# EAGLE board whisker_module (EAGLE 6.3), part 1 of 2
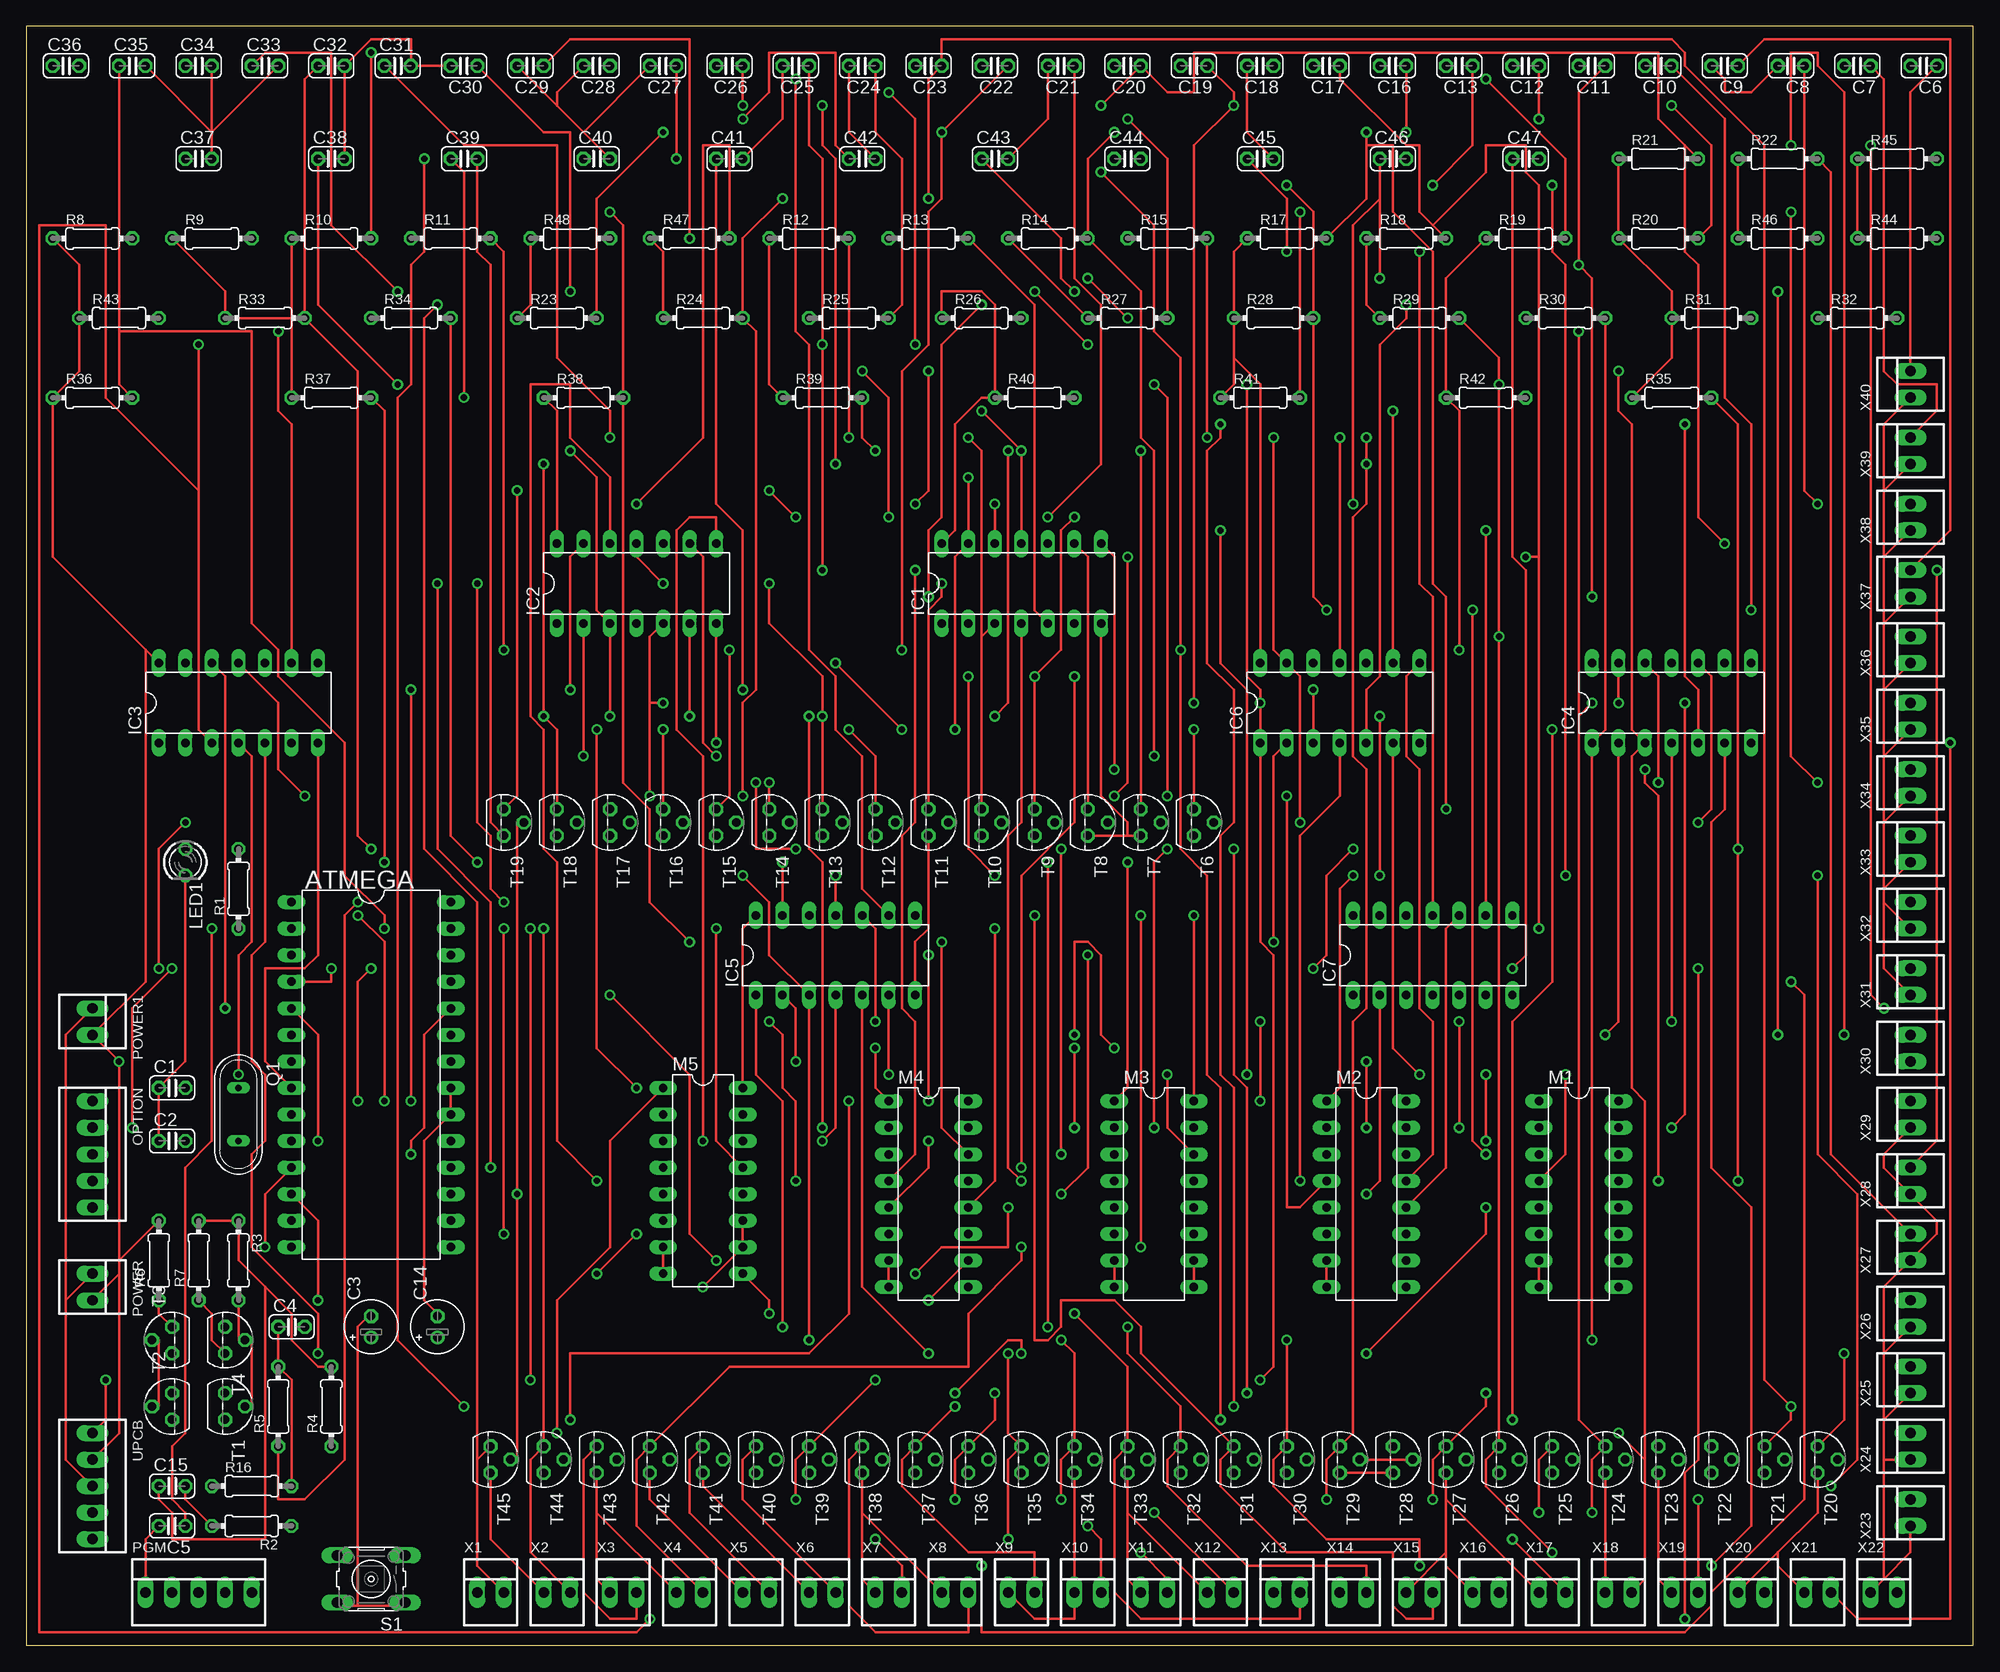
[diagram p0: board, top side]
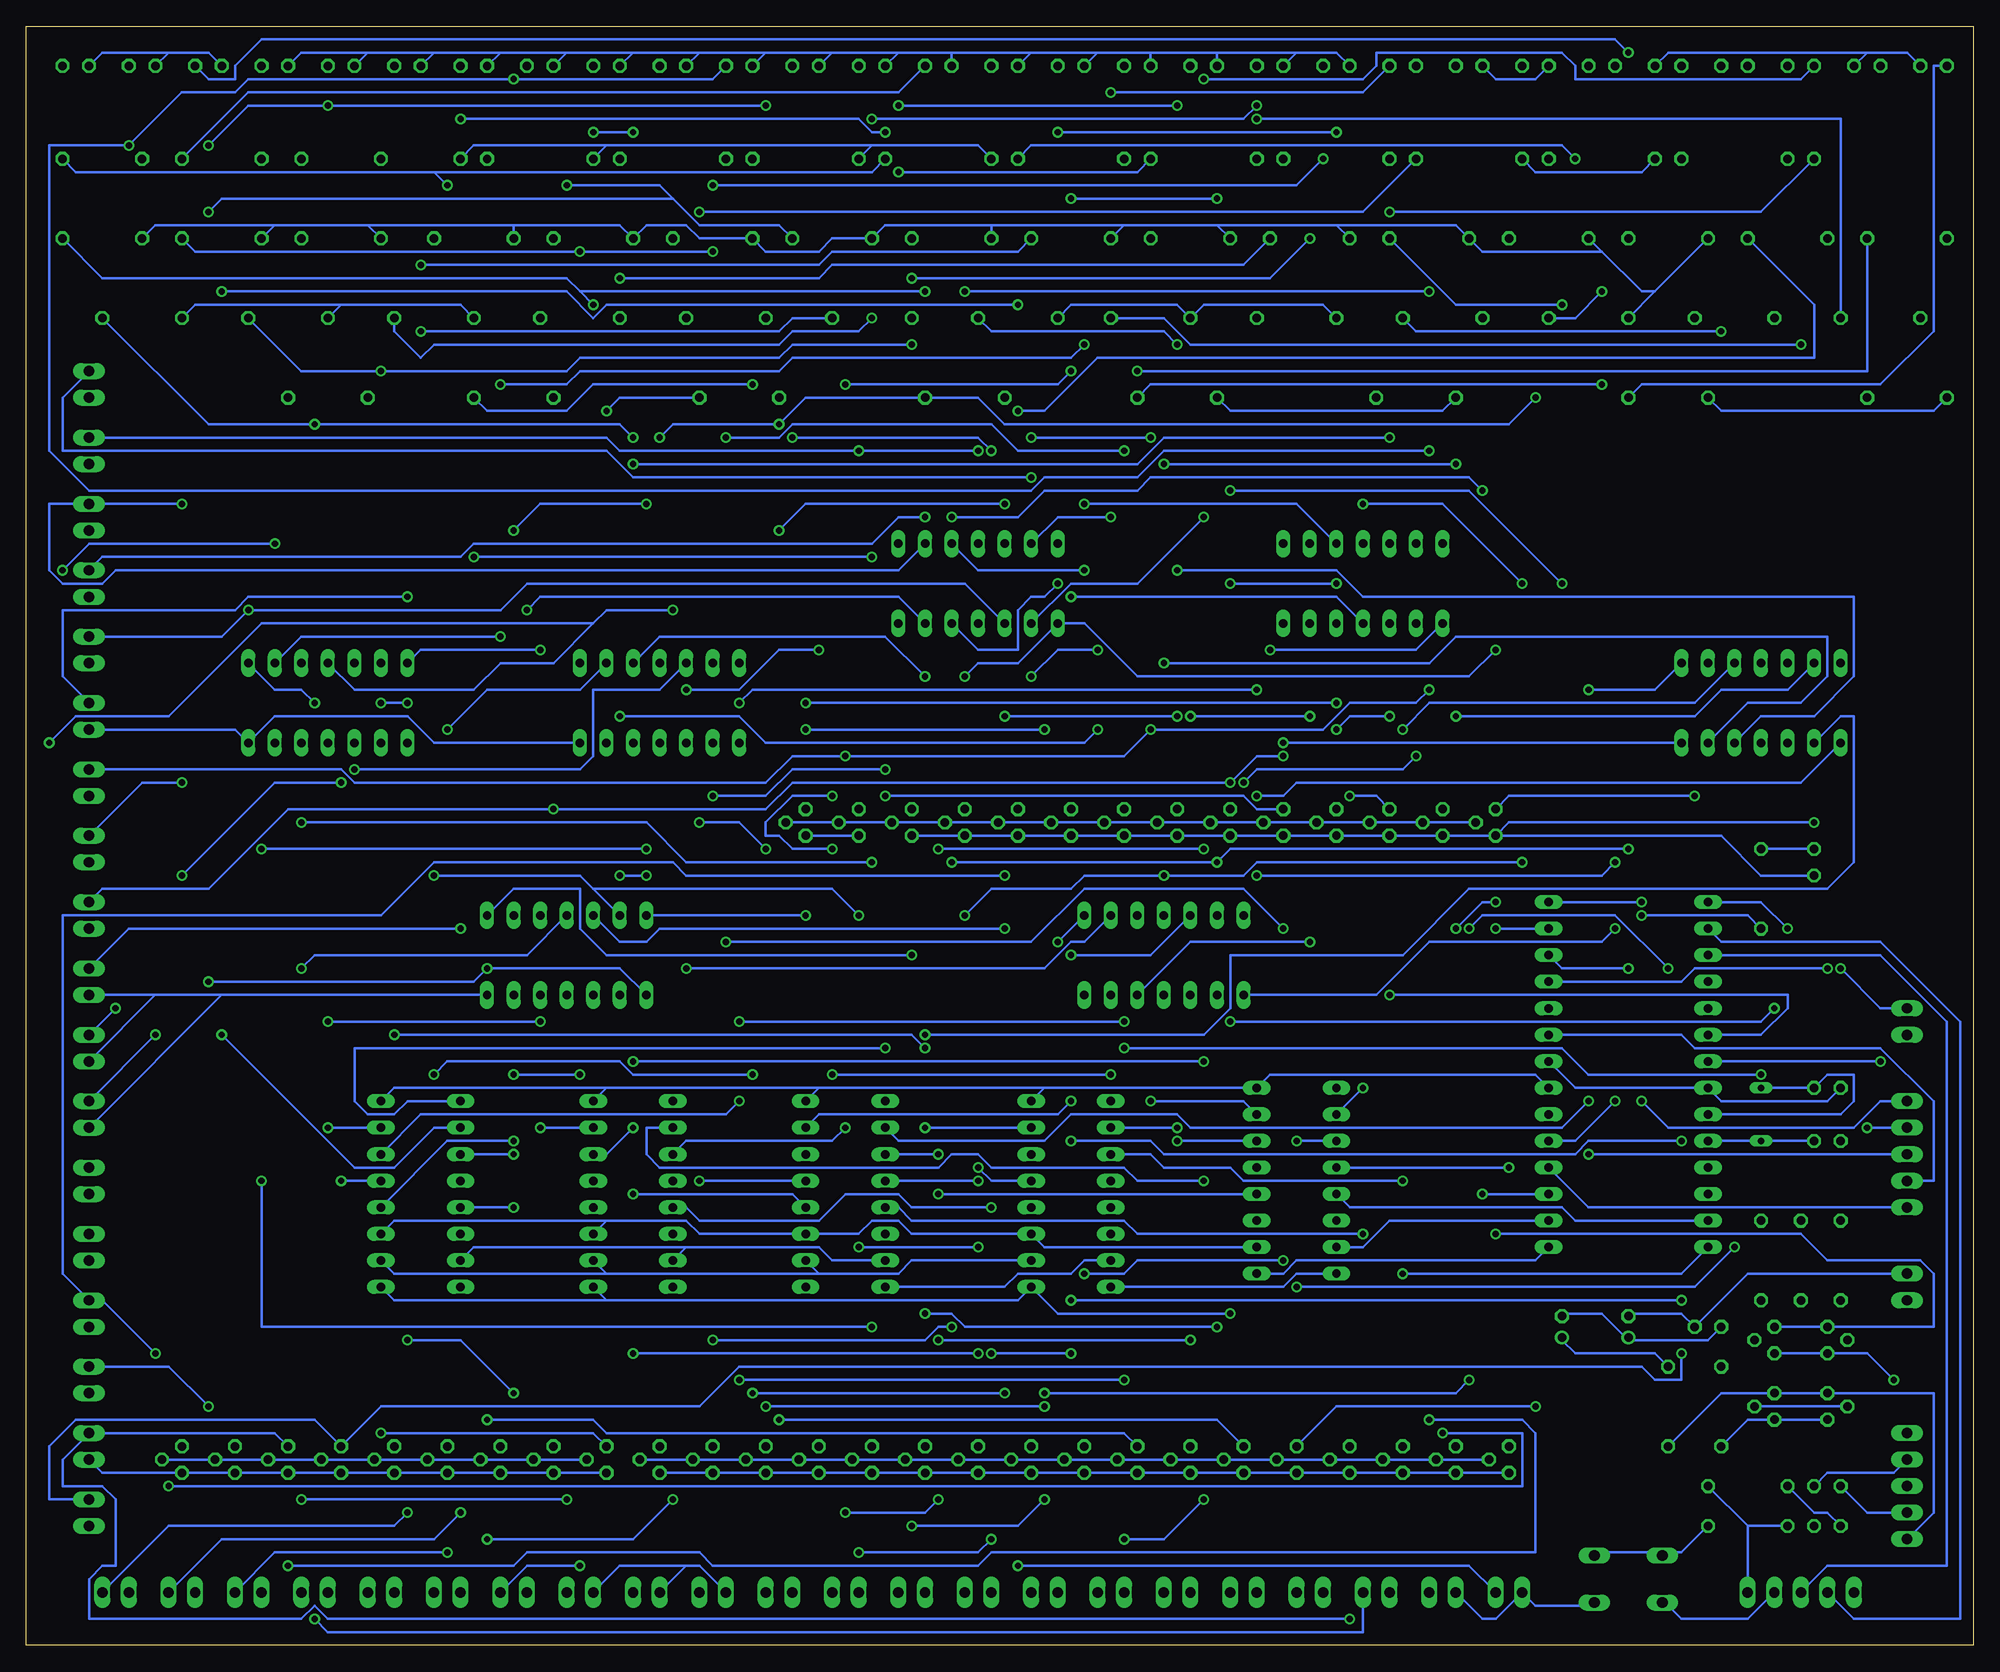
[diagram p1: board, bottom side, seen from below]

Size 186.36 x 154.93 mm. Coordinates in mm from the lower left corner, seen from the top.
Outline: 0,0 186.36,0 186.36,154.93 0,154.93 0,0
Copper layers (1*16): Top 0.035mm / dielectric 1.5mm / Bottom 0.035mm
Design rules "default": minimum track width 10mil, minimum drill 24mil, track to track 8mil, track to pad 8mil, pad to pad 8mil, via to via 8mil, smd to smd 8mil, copper to edge 40mil, drill to drill 8mil, minimum pad ring 10mil, minimum via ring 8mil, stop-mask expansion 4mil, vias tented up to drill 0mil, thermal gap 10mil

## Footprints (pad centres in the part's own frame; a part is rotated, then mirrored left to right if it is on the bottom)
DIL28-6 = drill 0.813 long: 1 -16.51,-7.62; 2 -13.97,-7.62; 3 -11.43,-7.62; 4 -8.89,-7.62; 5 -6.35,-7.62; 6 -3.81,-7.62; 7 -1.27,-7.62; 8 1.27,-7.62; 9 3.81,-7.62; 10 6.35,-7.62; 11 8.89,-7.62; 12 11.43,-7.62; 13 13.97,-7.62; 14 16.51,-7.62; 15 16.51,7.62; 16 13.97,7.62; 17 11.43,7.62; 18 8.89,7.62; 19 6.35,7.62; 20 3.81,7.62; 21 1.27,7.62; 22 -1.27,7.62; 23 -3.81,7.62; 24 -6.35,7.62; 25 -8.89,7.62; 26 -11.43,7.62; 27 -13.97,7.62; 28 -16.51,7.62
C025-024X044 = drill 0.813 octagon: 1 -1.27,0; 2 1.27,0
E2-5 = drill 0.813 pad 1.27: + -1.016,0 | drill 0.813 pad 1.27 octagon: - 1.016,0
DIL14 = drill 0.813 long: 1 -7.62,-3.81; 2 -5.08,-3.81; 3 -2.54,-3.81; 4 0,-3.81; 5 2.54,-3.81; 6 5.08,-3.81; 7 7.62,-3.81; 8 7.62,3.81; 9 5.08,3.81; 10 2.54,3.81; 11 0,3.81; 12 -2.54,3.81; 13 -5.08,3.81; 14 -7.62,3.81
LED3MM = drill 0.813 octagon: A -1.27,0; K 1.27,0
CD74HCT151E = drill 0.813 long: 1 -7.62,-3.81; 2 -5.08,-3.81; 3 -2.54,-3.81; 4 0,-3.81; 5 2.54,-3.81; 6 5.08,-3.81; 7 7.62,-3.81; 8 10.16,-3.81; 9 10.16,3.81; 10 7.62,3.81; 11 5.08,3.81; 12 2.54,3.81; 13 0,3.81; 14 -2.54,3.81; 15 -5.08,3.81; 16 -7.62,3.81
22-23-2051 = drill 1 long: 1 -5.08,0; 2 -2.54,0; 3 0,0; 4 2.54,0; 5 5.08,0
22-23-2021 = drill 1 long: 1 -1.27,0; 2 1.27,0
QS = drill 0.61 long: 1 -2.54,0; 2 2.54,0
0204/7 = drill 0.813 octagon: 1 -3.81,0; 2 3.81,0
B3F-10XX = drill 1.016 long: 1 -3.251,2.261; 2 3.251,2.261; 3 -3.251,-2.261; 4 3.251,-2.261
TO92-E1 = drill 0.813 octagon: 1 -1.27,0; 2 0,1.905; 3 1.27,0
TO92 = drill 0.813 octagon: 1 1.27,0; 2 0,1.905; 3 -1.27,0

## Placement (x,y rotation side)
ATMEGA  328  [DIL28-6]  33.02,54.61 270 top
C1  22PF  [C025-024X044]  13.97,53.34 0 top
C2  22PF  [C025-024X044]  13.97,48.26 0 top
C3  100uF  [E2-5]  33.02,30.48 90 top
C4  0.1uF  [C025-024X044]  25.4,30.48 0 top
C5  0.1uF  [C025-024X044]  13.97,11.43 180 top
C6  0.1uF  [C025-024X044]  181.61,151.13 180 top
C7  0.1uF  [C025-024X044]  175.26,151.13 180 top
C8  0.1uF  [C025-024X044]  168.91,151.13 180 top
C9  0.1uF  [C025-024X044]  162.56,151.13 180 top
C10  0.1uF  [C025-024X044]  156.21,151.13 180 top
C11  0.1uF  [C025-024X044]  149.86,151.13 180 top
C12  0.1uF  [C025-024X044]  143.51,151.13 180 top
C13  0.1uF  [C025-024X044]  137.16,151.13 180 top
C14  100uF  [E2-5]  39.37,30.48 90 top
C15  0.1uF  [C025-024X044]  13.97,15.24 0 top
C16  0.1uF  [C025-024X044]  130.81,151.13 180 top
C17  0.1uF  [C025-024X044]  124.46,151.13 180 top
C18  0.1uF  [C025-024X044]  118.11,151.13 180 top
C19  0.1uF  [C025-024X044]  111.76,151.13 180 top
C20  0.1uF  [C025-024X044]  105.41,151.13 180 top
C21  0.1uF  [C025-024X044]  99.06,151.13 180 top
C22  0.1uF  [C025-024X044]  92.71,151.13 180 top
C23  0.1uF  [C025-024X044]  86.36,151.13 180 top
C24  0.1uF  [C025-024X044]  80.01,151.13 180 top
C25  0.1uF  [C025-024X044]  73.66,151.13 180 top
C26  0.1uF  [C025-024X044]  67.31,151.13 180 top
C27  0.1uF  [C025-024X044]  60.96,151.13 180 top
C28  0.1uF  [C025-024X044]  54.61,151.13 180 top
C29  0.1uF  [C025-024X044]  48.26,151.13 180 top
C30  0.1uF  [C025-024X044]  41.91,151.13 180 top
C31  0.1uF  [C025-024X044]  35.56,151.13 0 top
C32  0.1uF  [C025-024X044]  29.21,151.13 0 top
C33  0.1uF  [C025-024X044]  22.86,151.13 0 top
C34  0.1uF  [C025-024X044]  16.51,151.13 0 top
C35  0.1uF  [C025-024X044]  10.16,151.13 0 top
C36  0.1uF  [C025-024X044]  3.81,151.13 0 top
C37  0.1uF  [C025-024X044]  16.51,142.24 0 top
C38  0.1uF  [C025-024X044]  29.21,142.24 0 top
C39  0.1uF  [C025-024X044]  41.91,142.24 0 top
C40  0.1uF  [C025-024X044]  54.61,142.24 0 top
C41  0.1uF  [C025-024X044]  67.31,142.24 0 top
C42  0.1uF  [C025-024X044]  80.01,142.24 0 top
C43  0.1uF  [C025-024X044]  92.71,142.24 0 top
C44  0.1uF  [C025-024X044]  105.41,142.24 0 top
C45  0.1uF  [C025-024X044]  118.11,142.24 0 top
C46  0.1uF  [C025-024X044]  130.81,142.24 0 top
C47  0.1uF  [C025-024X044]  143.51,142.24 0 top
IC1  74LS14N  [DIL14]  95.25,101.6 0 top
IC2  74LS14N  [DIL14]  58.42,101.6 0 top
IC3  74LS14N  [DIL14]  20.32,90.17 0 top
IC4  74LS14N  [DIL14]  157.48,90.17 0 top
IC5  74LS14N  [DIL14]  77.47,66.04 0 top
IC6  74LS14N  [DIL14]  125.73,90.17 0 top
IC7  74LS14N  [DIL14]  134.62,66.04 0 top
LED1  [LED3MM]  15.24,74.93 270 top
M1  CD74HCT151E  [CD74HCT151E]  148.59,44.45 270 top
M2  CD74HCT151E  [CD74HCT151E]  128.27,44.45 270 top
M3  CD74HCT151E  [CD74HCT151E]  107.95,44.45 270 top
M4  CD74HCT151E  [CD74HCT151E]  86.36,44.45 270 top
M5  CD74HCT151E  [CD74HCT151E]  64.77,45.72 270 top
OPTION  22-23-2051  [22-23-2051]  6.35,46.99 270 top
PGM  22-23-2051  [22-23-2051]  16.51,5.08 0 top
POWER  22-23-2021  [22-23-2021]  6.35,34.29 270 top
POWER1  22-23-2021  [22-23-2021]  6.35,59.69 270 top
Q1  16MHZ  [QS]  20.32,50.8 270 top
R1  220OHM  [0204/7]  20.32,72.39 90 top
R2  10KOHM  [0204/7]  21.59,11.43 180 top
R3  10KOHM  [0204/7]  20.32,36.83 270 top
R4  10KOHM  [0204/7]  29.21,22.86 90 top
R5  10KOHM  [0204/7]  24.13,22.86 90 top
R6  10KOHM  [0204/7]  12.7,36.83 90 top
R7  10KOHM  [0204/7]  16.51,36.83 90 top
R8  10KOHM  [0204/7]  6.35,134.62 0 top
R9  10KOHM  [0204/7]  17.78,134.62 0 top
R10  10KOHM  [0204/7]  29.21,134.62 0 top
R11  10KOHM  [0204/7]  40.64,134.62 0 top
R12  10KOHM  [0204/7]  74.93,134.62 0 top
R13  10KOHM  [0204/7]  86.36,134.62 0 top
R14  10KOHM  [0204/7]  97.79,134.62 0 top
R15  10KOHM  [0204/7]  109.22,134.62 0 top
R16  10KOHM  [0204/7]  21.59,15.24 0 top
R17  10KOHM  [0204/7]  120.65,134.62 0 top
R18  10KOHM  [0204/7]  132.08,134.62 0 top
R19  10KOHM  [0204/7]  143.51,134.62 0 top
R20  10KOHM  [0204/7]  156.21,134.62 0 top
R21  10KOHM  [0204/7]  156.21,142.24 0 top
R22  10KOHM  [0204/7]  167.64,142.24 0 top
R23  10KOHM  [0204/7]  50.8,127 0 top
R24  10KOHM  [0204/7]  64.77,127 0 top
R25  10KOHM  [0204/7]  78.74,127 0 top
R26  10KOHM  [0204/7]  91.44,127 0 top
R27  10KOHM  [0204/7]  105.41,127 0 top
R28  10KOHM  [0204/7]  119.38,127 0 top
R29  10KOHM  [0204/7]  133.35,127 0 top
R30  10KOHM  [0204/7]  147.32,127 0 top
R31  10KOHM  [0204/7]  161.29,127 0 top
R32  10KOHM  [0204/7]  175.26,127 0 top
R33  10KOHM  [0204/7]  22.86,127 0 top
R34  10KOHM  [0204/7]  36.83,127 0 top
R35  10KOHM  [0204/7]  157.48,119.38 0 top
R36  10KOHM  [0204/7]  6.35,119.38 0 top
R37  10KOHM  [0204/7]  29.21,119.38 0 top
R38  10KOHM  [0204/7]  53.34,119.38 0 top
R39  10KOHM  [0204/7]  76.2,119.38 0 top
R40  10KOHM  [0204/7]  96.52,119.38 0 top
R41  10KOHM  [0204/7]  118.11,119.38 0 top
R42  10KOHM  [0204/7]  139.7,119.38 0 top
R43  10KOHM  [0204/7]  8.89,127 0 top
R44  10KOHM  [0204/7]  179.07,134.62 0 top
R45  10KOHM  [0204/7]  179.07,142.24 0 top
R46  10KOHM  [0204/7]  167.64,134.62 0 top
R47  10KOHM  [0204/7]  63.5,134.62 0 top
R48  10KOHM  [0204/7]  52.07,134.62 0 top
S1  [B3F-10XX]  33.02,6.35 180 top
T1  BJT  [TO92-E1]  19.05,22.86 270 top
T2  BJT  [TO92-E1]  13.97,22.86 90 top
T3  BJT  [TO92-E1]  13.97,29.21 90 top
T4  BJT  [TO92-E1]  19.05,29.21 270 top
T6  2N3565  [TO92]  111.76,78.74 270 top
T7  2N3565  [TO92]  106.68,78.74 270 top
T8  2N3565  [TO92]  101.6,78.74 270 top
T9  2N3565  [TO92]  96.52,78.74 270 top
T10  2N3565  [TO92]  91.44,78.74 270 top
T11  2N3565  [TO92]  86.36,78.74 270 top
T12  2N3565  [TO92]  81.28,78.74 270 top
T13  2N3565  [TO92]  76.2,78.74 270 top
T14  2N3565  [TO92]  71.12,78.74 270 top
T15  2N3565  [TO92]  66.04,78.74 270 top
T16  2N3565  [TO92]  60.96,78.74 270 top
T17  2N3565  [TO92]  55.88,78.74 270 top
T18  2N3565  [TO92]  50.8,78.74 270 top
T19  2N3565  [TO92]  45.72,78.74 270 top
T20  2N3565  [TO92]  171.45,17.78 270 top
T21  2N3565  [TO92]  166.37,17.78 270 top
T22  2N3565  [TO92]  161.29,17.78 270 top
T23  2N3565  [TO92]  156.21,17.78 270 top
T24  2N3565  [TO92]  151.13,17.78 270 top
T25  2N3565  [TO92]  146.05,17.78 270 top
T26  2N3565  [TO92]  140.97,17.78 270 top
T27  2N3565  [TO92]  135.89,17.78 270 top
T28  2N3565  [TO92]  130.81,17.78 270 top
T29  2N3565  [TO92]  125.73,17.78 270 top
T30  2N3565  [TO92]  120.65,17.78 270 top
T31  2N3565  [TO92]  115.57,17.78 270 top
T32  2N3565  [TO92]  110.49,17.78 270 top
T33  2N3565  [TO92]  105.41,17.78 270 top
T34  2N3565  [TO92]  100.33,17.78 270 top
T35  2N3565  [TO92]  95.25,17.78 270 top
T36  2N3565  [TO92]  90.17,17.78 270 top
T37  2N3565  [TO92]  85.09,17.78 270 top
T38  2N3565  [TO92]  80.01,17.78 270 top
T39  2N3565  [TO92]  74.93,17.78 270 top
T40  2N3565  [TO92]  69.85,17.78 270 top
T41  2N3565  [TO92]  64.77,17.78 270 top
T42  2N3565  [TO92]  59.69,17.78 270 top
T43  2N3565  [TO92]  54.61,17.78 270 top
T44  2N3565  [TO92]  49.53,17.78 270 top
T45  2N3565  [TO92]  44.45,17.78 270 top
UPCB  22-23-2051  [22-23-2051]  6.35,15.24 270 top
X1  22-23-2021  [22-23-2021]  44.45,5.08 0 top
X2  22-23-2021  [22-23-2021]  50.8,5.08 0 top
X3  22-23-2021  [22-23-2021]  57.15,5.08 0 top
X4  22-23-2021  [22-23-2021]  63.5,5.08 0 top
X5  22-23-2021  [22-23-2021]  69.85,5.08 0 top
X6  22-23-2021  [22-23-2021]  76.2,5.08 0 top
X7  22-23-2021  [22-23-2021]  82.55,5.08 0 top
X8  22-23-2021  [22-23-2021]  88.9,5.08 0 top
X9  22-23-2021  [22-23-2021]  95.25,5.08 0 top
X10  22-23-2021  [22-23-2021]  101.6,5.08 0 top
X11  22-23-2021  [22-23-2021]  107.95,5.08 0 top
X12  22-23-2021  [22-23-2021]  114.3,5.08 0 top
X13  22-23-2021  [22-23-2021]  120.65,5.08 0 top
X14  22-23-2021  [22-23-2021]  127,5.08 0 top
X15  22-23-2021  [22-23-2021]  133.35,5.08 0 top
X16  22-23-2021  [22-23-2021]  139.7,5.08 0 top
X17  22-23-2021  [22-23-2021]  146.05,5.08 0 top
X18  22-23-2021  [22-23-2021]  152.4,5.08 0 top
X19  22-23-2021  [22-23-2021]  158.75,5.08 0 top
X20  22-23-2021  [22-23-2021]  165.1,5.08 0 top
X21  22-23-2021  [22-23-2021]  171.45,5.08 0 top
X22  22-23-2021  [22-23-2021]  177.8,5.08 0 top
X23  22-23-2021  [22-23-2021]  180.34,12.7 90 top
X24  22-23-2021  [22-23-2021]  180.34,19.05 90 top
X25  22-23-2021  [22-23-2021]  180.34,25.4 90 top
X26  22-23-2021  [22-23-2021]  180.34,31.75 90 top
X27  22-23-2021  [22-23-2021]  180.34,38.1 90 top
X28  22-23-2021  [22-23-2021]  180.34,44.45 90 top
X29  22-23-2021  [22-23-2021]  180.34,50.8 90 top
X30  22-23-2021  [22-23-2021]  180.34,57.15 90 top
X31  22-23-2021  [22-23-2021]  180.34,63.5 90 top
X32  22-23-2021  [22-23-2021]  180.34,69.85 90 top
X33  22-23-2021  [22-23-2021]  180.34,76.2 90 top
X34  22-23-2021  [22-23-2021]  180.34,82.55 90 top
X35  22-23-2021  [22-23-2021]  180.34,88.9 90 top
X36  22-23-2021  [22-23-2021]  180.34,95.25 90 top
X37  22-23-2021  [22-23-2021]  180.34,101.6 90 top
X38  22-23-2021  [22-23-2021]  180.34,107.95 90 top
X39  22-23-2021  [22-23-2021]  180.34,114.3 90 top
X40  22-23-2021  [22-23-2021]  180.34,120.65 90 top

## Library data of the parts
ATMEGA = ic-package
C1-C47 R1-R48 = rcl
IC1-IC7 = 74xx-us
LED1 = led
M1-M5 = Custom
OPTION PGM UPCB = con-molex; MF: MOLEX; MPN: 22-23-2051; OC_FARNELL: 1462952; OC_NEWARK: 38C9178
POWER POWER1 X1-X40 = con-molex; MF: MOLEX; MPN: 22-23-2021; OC_FARNELL: 1462926; OC_NEWARK: 25C3832
Q1 = special
S1 = switch-omron; MPN: B3F-1000; OC_FARNELL: 176432; OC_NEWARK: 36M3542
T1-T4 T6-T45 = transistor

## Nets
3V: C14.+ C15.1 R3.1 R4.2 R7.2 UPCB.4
5V: ATMEGA.7 ATMEGA.20 ATMEGA.21 C3.+ C4.1 C14.- C15.2 IC1.14 IC2.14 IC3.14 IC4.14 IC5.14 IC6.14 IC7.14 M1.16 M2.16 M3.16 M4.16 M5.16 PGM.5 POWER1.2 POWER.2 R2.2 R5.2 R6.2 R8.1 R9.1 R10.1 R11.1 R12.1 R13.1 R14.1 R15.1 R16.2 R17.1 R18.1 R19.1 R20.1 R21.1 R22.1 R23.1 R24.1 R25.1 R26.1 R27.1 R28.1 R29.1 R30.1 R31.1 R32.1 R33.1 R34.1 R35.1 R36.1 R37.1 R38.1 R39.1 R40.1 R41.1 R42.1 R43.1 R44.1 R45.1 R46.1 R47.1 R48.1 UPCB.2
CLK-1: ATMEGA.9 C1.2 Q1.1
CLK-2: ATMEGA.10 C2.2 Q1.2
D1: IC1.12 M1.4
D2: IC1.10 M4.4
D3: IC1.8 M2.4
D4: IC1.2 M5.4
D5: IC1.4 M3.4
D6: IC1.6 M1.3
D7: IC2.12 M4.3
D8: IC2.10 M2.3
D9: IC2.8 M5.3
D10: IC2.2 M3.3
D11: IC2.4 M1.2
D12: IC2.6 M4.2
D13: IC3.12 M2.2
D14: IC3.10 M5.2
D15: IC3.8 M3.2
D16: IC3.2 M1.1
D17: IC3.4 M4.1
D18: IC3.6 M2.1
D19: IC4.12 M5.1
D20: IC4.10 M3.1
D21: IC4.8 M1.15
D22: IC4.2 M4.15
D23: IC4.4 M2.15
D24: IC4.6 M5.15
D25: IC5.12 M3.15
D26: IC5.10 M1.14
D27: IC5.8 M4.14
D28: IC5.2 M2.14
D29: IC5.4 M5.14
D30: IC5.6 M3.14
D31: IC6.12 M1.13
D32: IC6.10 M4.13
D33: IC6.8 M2.13
D34: IC6.2 M5.13
D35: IC6.4 M3.13
D36: IC6.6 M1.12
D37: IC7.12 M4.12
D38: IC7.10 M2.12
D39: IC7.8 M5.12
D40: IC7.2 M3.12
GND: ATMEGA.8 ATMEGA.22 C1.1 C2.1 C3.- C4.2 C6.2 C7.2 C8.2 C9.2 C10.2 C11.2 C12.2 C13.2 C16.2 C17.2 C18.2 C19.2 C20.2 C21.2 C22.2 C23.2 C24.2 C25.2 C26.2 C27.2 C28.2 C29.2 C30.2 C31.2 C32.2 C33.2 C34.2 C35.2 C36.2 C37.2 C38.2 C39.2 C40.2 C41.2 C42.2 C43.2 C44.2 C45.2 C46.2 C47.2 IC1.7 IC2.7 IC3.7 IC4.7 IC5.7 IC6.7 IC7.7 LED1.K PGM.4 POWER1.1 POWER.1 S1.1 S1.2 T6.1 T7.1 T8.1 T9.1 T10.1 T11.1 T12.1 T13.1 T14.1 T15.1 T16.1 T17.1 T18.1 T19.1 T20.1 T21.1 T22.1 T23.1 T24.1 T25.1 T26.1 T27.1 T28.1 T29.1 T30.1 T31.1 T32.1 T33.1 T34.1 T35.1 T36.1 T37.1 T38.1 T39.1 T40.1 T41.1 T42.1 T43.1 T44.1 T45.1 UPCB.3 X1.1 X2.1 X3.1 X4.1 X5.1 X6.1 X7.1 X8.1 X9.1 X10.1 X11.1 X12.1 X13.1 X14.1 X15.1 X16.1 X17.1 X18.1 X19.1 X20.1 X21.1 X22.1 X23.1 X24.1 X25.1 X26.1 X27.1 X28.1 X29.1 X30.1 X31.1 X32.1 X33.1 X34.1 X35.1 X36.1 X37.1 X38.1 X39.1 X40.1
I2C-EN: R3.2 T1.2 T2.2 T3.2 T4.2
LEDNET-1: ATMEGA.19 R1.1
LEDNET-2: LED1.A R1.2
OPTION1: ATMEGA.26 OPTION.1
OPTION2: ATMEGA.25 OPTION.2
OPTION3: ATMEGA.24 OPTION.3
OPTION4: ATMEGA.23 OPTION.4
OPTION5: ATMEGA.18 OPTION.5
RESULT1: ATMEGA.4 M1.5
RESULT2: ATMEGA.5 M4.5
RESULT3: ATMEGA.6 M2.5
RESULT4: ATMEGA.13 M5.5
RESULT5: ATMEGA.14 M3.5
RST-1: C5.2 PGM.1 R16.1
RST-2: ATMEGA.1 C5.1
RST-SW: R2.1 S1.3 S1.4
RX-TX: ATMEGA.3 PGM.3
SCL: R4.1 T1.1 T2.3 UPCB.5
SCL-5V: ATMEGA.28 R5.1 T1.3 T2.1
SDA: R7.1 T3.1 T4.3 UPCB.1
SDA-5V: ATMEGA.27 R6.1 T3.3 T4.1
SELECT1: ATMEGA.11 M1.11 M2.11 M3.11 M4.11 M5.10 M5.11
SELECT2: ATMEGA.12 M1.10 M2.10 M3.9 M3.10 M4.10
SELECT3: ATMEGA.15 M1.9 M2.9 M4.9 M5.9
SELECT4: ATMEGA.16 M1.7 M1.8 M2.7 M2.8 M3.7 M3.8 M4.7 M4.8 M5.7 M5.8
SELECT5: ATMEGA.17 T6.2 T7.2 T8.2 T9.2 T10.2 T11.2 T12.2 T13.2 T14.2 T15.2 T16.2 T17.2 T18.2 T19.2 T20.2 T21.2 T22.2 T23.2 T24.2 T25.2 T26.2 T27.2 T28.2 T29.2 T30.2 T31.2 T32.2 T33.2 T34.2 T35.2 T36.2 T37.2 T38.2 T39.2 T40.2 T41.2 T42.2 T43.2 T44.2 T45.2
TX-RX: ATMEGA.2 PGM.2
W1: C6.1 IC1.13 R8.2 T6.3 X40.2
W2: C7.1 IC1.11 R9.2 T7.3 X39.2
W3: C8.1 IC1.9 R10.2 T8.3 X38.2
W4: C9.1 IC1.1 R11.2 T9.3 X37.2
W5: C10.1 IC1.3 R12.2 T10.3 X36.2
W6: C11.1 IC1.5 R13.2 T11.3 X35.2
W7: C12.1 IC2.13 R14.2 T12.3 X34.2
W8: C13.1 IC2.11 R15.2 T13.3 X33.2
W9: C16.1 IC2.9 R17.2 T14.3 X32.2
W10: C17.1 IC2.1 R18.2 T15.3 X31.2
W11: C18.1 IC2.3 R19.2 T16.3 X30.2
W12: C19.1 IC2.5 R20.2 T17.3 X29.2
W13: C20.1 IC3.13 R21.2 T18.3 X28.2
W14: C21.1 IC3.11 R22.2 T19.3 X27.2
W15: C22.1 IC3.9 R23.2 T20.3 X26.2
W16: C23.1 IC3.1 R24.2 T21.3 X25.2
W17: C24.1 IC3.3 R25.2 T22.3 X24.2
W18: C25.1 IC3.5 R26.2 T23.3 X23.2
W19: C26.1 IC4.13 R27.2 T24.3 X22.2
W20: C27.1 IC4.11 R28.2 T25.3 X21.2
W21: C28.1 IC4.9 R29.2 T26.3 X20.2
W22: C29.1 IC4.1 R30.2 T27.3 X19.2
W23: C30.1 IC4.3 R31.2 T28.3 X18.2
W24: C31.1 IC4.5 R32.2 T29.3 X17.2
W25: C32.1 IC5.13 R33.2 T30.3 X16.2
W26: C33.1 IC5.11 R34.2 T31.3 X15.2
W27: C34.1 IC5.9 R35.2 T32.3 X14.2
W28: C35.1 IC5.1 R36.2 T33.3 X13.2
W29: C36.1 IC5.3 R37.2 T34.3 X12.2
W30: C37.1 IC5.5 R38.2 T35.3 X11.2
W31: C38.1 IC6.13 R39.2 T36.3 X10.2
W32: C39.1 IC6.11 R40.2 T37.3 X9.2
W33: C40.1 IC6.9 R41.2 T38.3 X8.2
W34: C41.1 IC6.1 R42.2 T39.3 X7.2
W35: C42.1 IC6.3 R43.2 T40.3 X6.2
W36: C43.1 IC6.5 R44.2 T41.3 X5.2
W37: C44.1 IC7.13 R45.2 T42.3 X4.2
W38: C45.1 IC7.11 R46.2 T43.3 X3.2
W39: C46.1 IC7.9 R47.2 T44.3 X2.2
W40: C47.1 IC7.1 R48.2 T45.3 X1.2